# Altium PCB LogicsOnly.PcbDoc (part 3 of 3)
Units mm, origin at the board's own origin, x right, y up, seen from the top; angles counter-clockwise.
Board outline 98.85 x 158 mm, 2 copper layers (Top Layer, Bottom Layer); 236 components, 165 nets, 784 pads, 89 vias.
Unrouted connection lines stored in the file: 82.
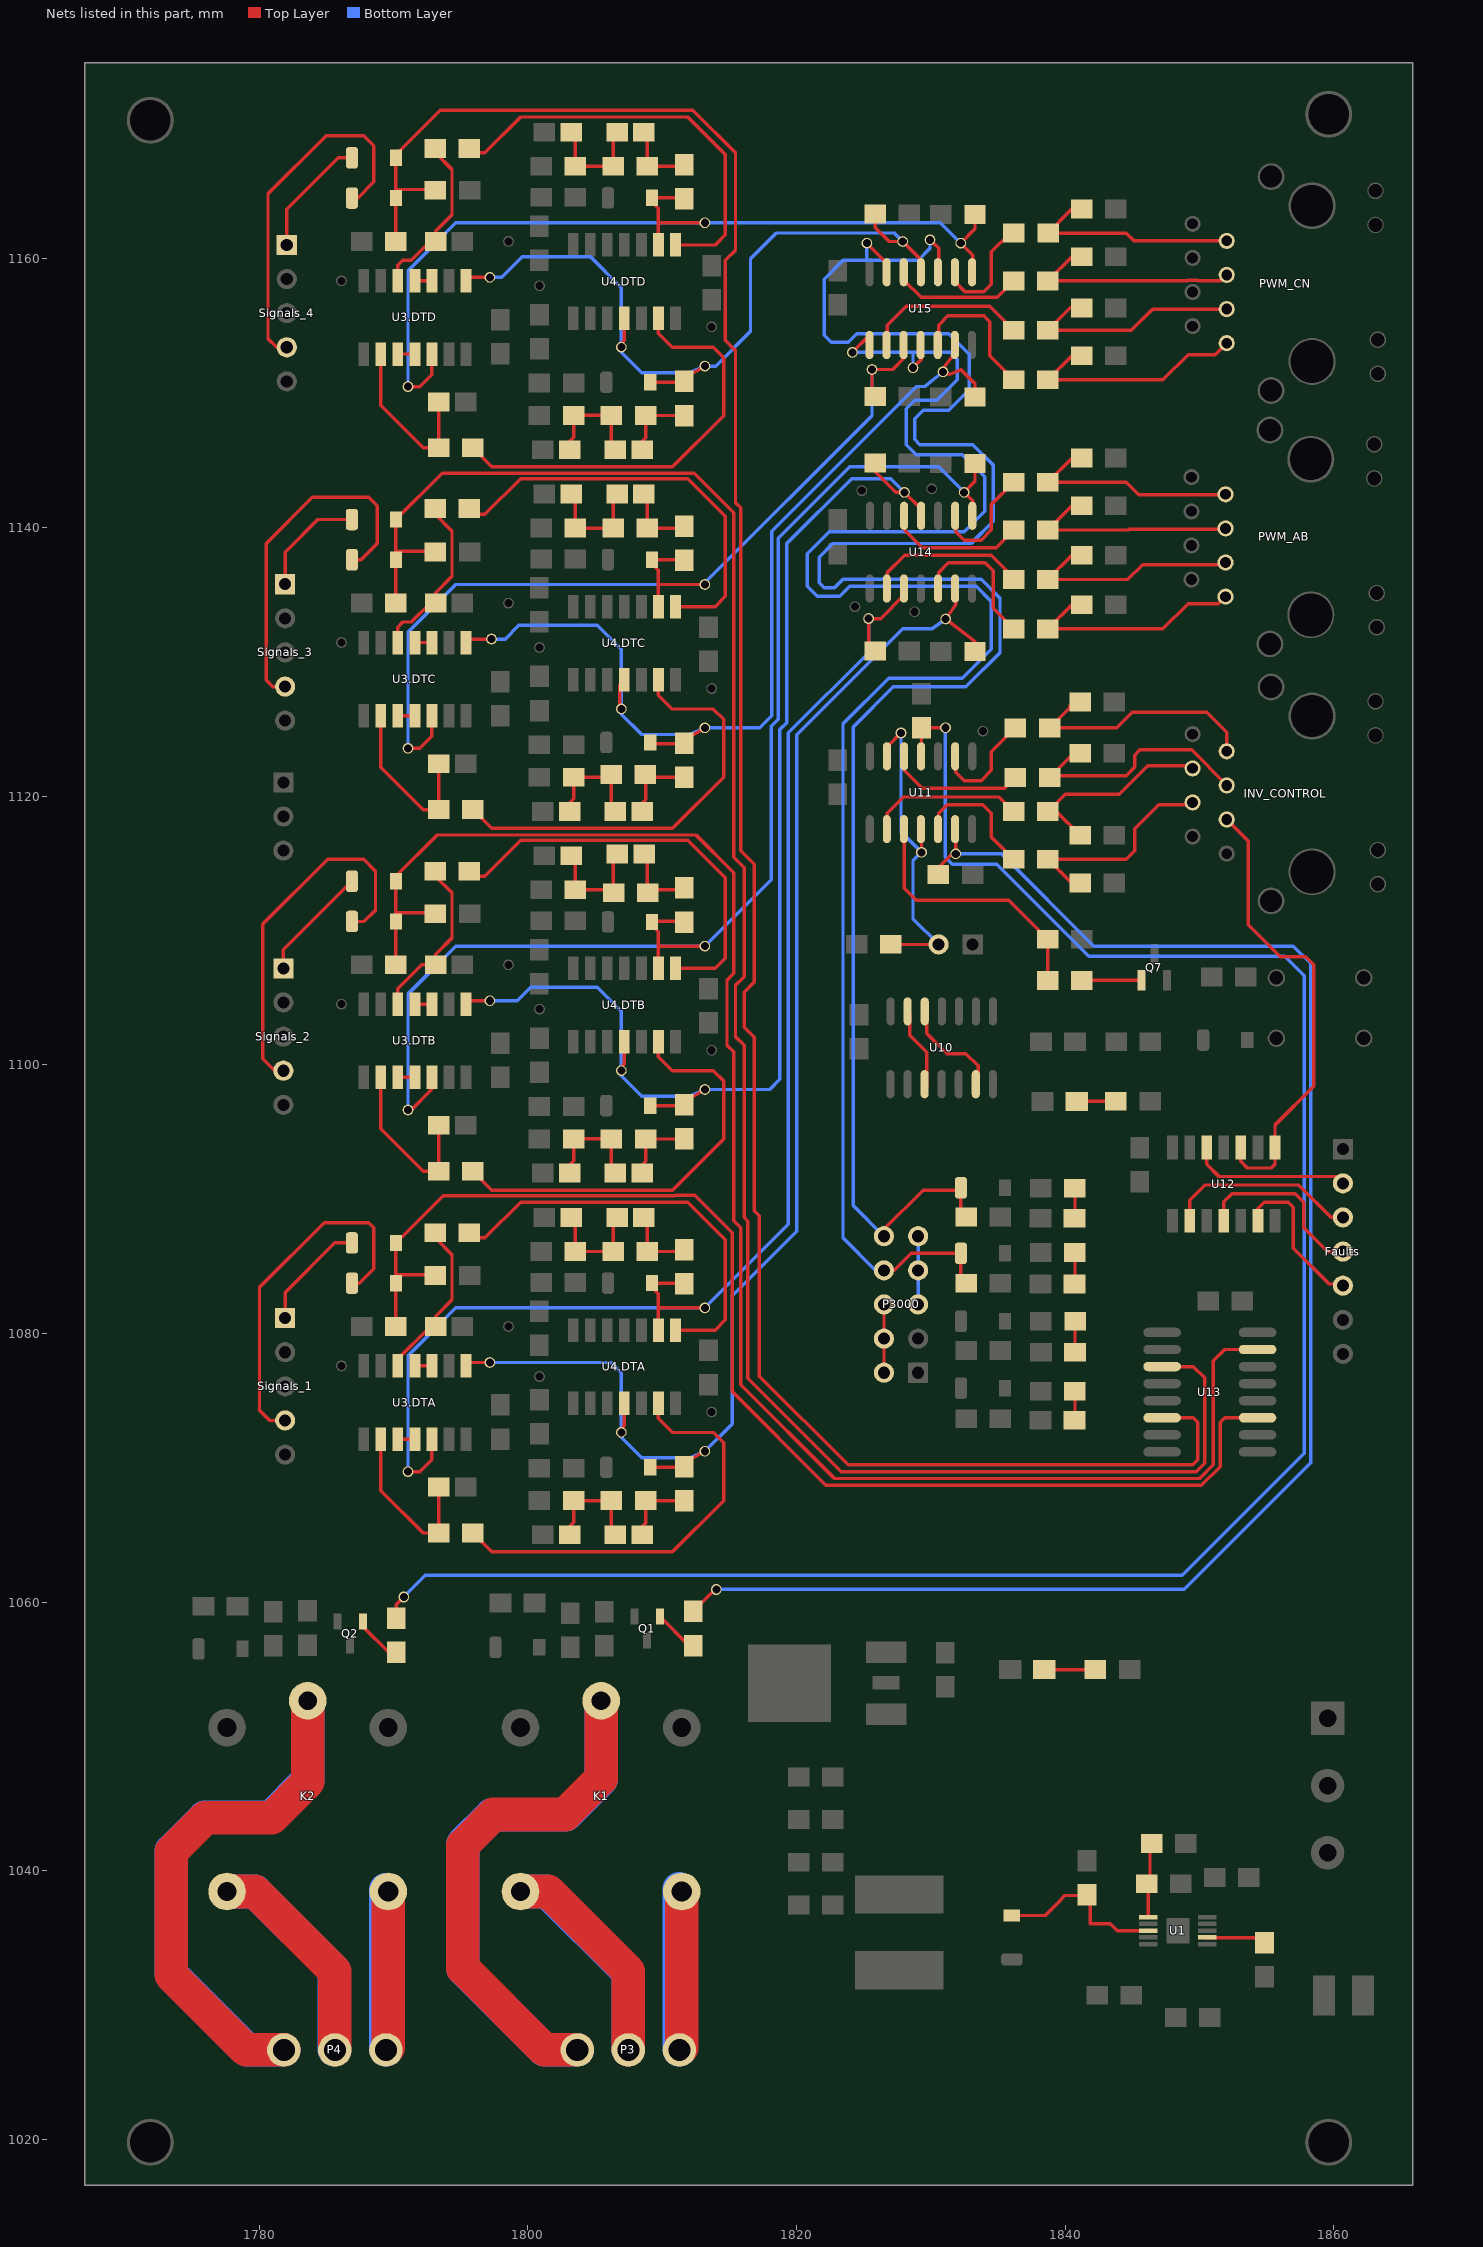
[diagram p3: the nets of this part, all layers, seen from the top]

## Via types
v1: diameter 0.8, hole 0.6, Top Layer to Bottom Layer, 59 vias
v2: diameter 0.914/0.914 (per signal layer), hole 0.6, Top Layer to Bottom Layer, 26 vias
v3: diameter 1.27, hole 0.711, Top Layer to Bottom Layer, 4 vias

## Nets (pads, with @x,y where several pads share a name; then routed paths per layer and width w, separated by ;. In a path a pad name is that pad's centre, name@x,y a point inside that pad or via, vN(x,y) a via of type N, cw(c..) or ccw(c..) an arc to the next point about the centre after c; other vN are vias at no path point) (continued)
NetD24_2: D24.2 P3000.8 pad.28 pad.29 R70.2 U15.1 U15.4 | length 131.2
  Top Layer w0.254: pad.28@1824.156,1153.033 U15.1@1825.489,1154.366 ; P3000.8@1826.505,1084.707 1827.267,1084.707 1828.537,1085.977 1831.728,1085.977 ; pad.29@1828.664,1151.89 1829.299,1152.525 U15.4@1829.299,1154.366 ; D24.2@1832.236,1085.977 1832.236,1084.137 R70.2@1832.621,1083.752
  Bottom Layer w0.254: pad.28@1824.156,1153.033 1828.664,1153.033 ; P3000.8@1826.505,1084.707 1825.87,1084.707 1823.457,1087.12 1823.457,1125.387 1826.846,1128.776 1832.347,1128.776 1834.506,1130.935 1834.506,1134.491 1833.363,1135.634 1823.965,1135.634 1823.203,1134.872 1821.552,1134.872 1820.79,1135.634 1820.79,1138.047 1822.441,1139.698 1832.474,1139.698 1833.998,1141.222 1833.998,1143.762 1832.347,1145.413 1828.918,1145.413 1828.156,1146.175 1828.156,1148.842 1828.791,1149.477 1830.442,1149.477 1831.966,1151.001 1831.966,1152.525 1831.458,1153.033 1828.664,1153.033 ; pad.29@1828.664,1151.89 1828.664,1153.033
NetD25_2: D25.2 P3000.10 pad.26 pad.27 R71.2 U15.10 U15.13 | length 148.3
  Top Layer w0.254: pad.27@1825.235,1161.161 1826.759,1159.637 U15.13@1826.759,1159.066 ; P3000.10@1826.505,1087.247 1826.505,1087.755 1829.426,1090.676 D25.2@1832.236,1090.676 ; pad.26@1830.061,1161.288 1830.569,1160.78 U15.10@1830.569,1159.066 ; D25.2@1832.236,1090.851 D25.2@1832.236,1090.676 ; R71.2@1832.621,1088.679 1832.236,1089.064 D25.2@1832.236,1090.676
  Bottom Layer w0.254: pad.27@1825.235,1161.161 1825.235,1159.891 ; P3000.10@1826.505,1087.247 1824.219,1089.533 1824.219,1125.149 1827.211,1128.141 1832.601,1128.141 1835.141,1130.681 1835.141,1134.745 1833.744,1136.142 1823.457,1136.142 1822.822,1135.507 1822.06,1135.507 1821.679,1135.888 1821.679,1137.793 1822.695,1138.809 1832.982,1138.809 1834.633,1140.46 1834.633,1144.651 1833.109,1146.175 1829.172,1146.175 1828.791,1146.556 1828.791,1148.08 1829.426,1148.715 1831.331,1148.715 1832.855,1150.239 1832.855,1152.906 1831.331,1154.43 1824.473,1154.43 1823.838,1153.795 1822.568,1153.795 1822.06,1154.303 1822.06,1158.494 1823.457,1159.891 1825.235,1159.891 ; pad.26@1829.934,1161.415 1829.934,1160.78 1829.045,1159.891 1825.235,1159.891
NetD26_1: D26.1 R64.1 | length 2.1
  Top Layer w0.254: D26.1@1840.697,1073.756 1840.722,1073.782 R64.1@1840.722,1075.703 R64.1@1840.722,1075.877
NetD27_1: D27.1 R65.1 | length 2.1
  Top Layer w0.254: D27.1@1840.722,1078.684 R65.1@1840.722,1080.792
NetD28_1: D28.1 R66.1 | length 2.4
  Top Layer w0.254: D28.1@1840.697,1083.688 1840.722,1083.713 R66.1@1840.722,1086.041
NetD29_1: D29.1 R67.1 | length 2.2
  Top Layer w0.254: D29.1@1840.697,1088.59 1840.722,1088.616 R67.1@1840.722,1090.812
NetD32_2: D32.2 R73.2 | length 3.8
  Top Layer w0.254: D32.2@1838.443,1054.989 1842.237,1054.989 R73.2@1842.246,1054.998
NetD33_1: D33.1 Rsns1.1 U1.8 | length 13.6
  Top Layer w0.254: D33.1@1836.03,1036.685 1838.503,1036.685 1839.357,1037.539 1839.967,1038.174 Rsns1.1@1841.631,1038.174 ; Rsns1.1@1841.631,1038.631 Rsns1.1@1841.631,1038.174 ; U1.8@1846.19,1035.558 1843.872,1035.558 1843.364,1036.066 1841.872,1036.066 1841.872,1038.174 Rsns1.1@1841.631,1038.174
NetD445_2: D445.2 R48.2 | length 2.9
  Top Layer w0.254: D445.2@1840.856,1097.28 1843.761,1097.28 R48.2@1843.77,1097.289
NetFaults_2: Faults.2 U12.12 | length 12
  Top Layer w0.254: U12.12@1850.53,1093.851 1850.53,1092.603 1851.442,1091.692 1860.16,1091.692 Faults.2@1860.668,1091.184
NetFaults_3: Faults.3 U12.2 | length 14.4
  Top Layer w0.254: U12.2@1849.26,1088.401 1849.26,1089.936 1850.381,1091.057 1857.366,1091.057 1859.779,1088.644 Faults.3@1860.668,1088.644
NetFaults_4: Faults.4 U12.4 | length 13.4
  Top Layer w0.254: U12.4@1851.8,1088.401 1851.8,1089.809 1852.413,1090.422 1857.112,1090.422 1857.747,1089.787 1857.747,1087.882 1859.525,1086.104 Faults.4@1860.668,1086.104
NetFaults_5: Faults.5 U12.6 | length 11.7
  Top Layer w0.254: U12.6@1854.34,1088.401 1854.34,1089.301 1854.826,1089.787 1856.604,1089.787 1856.985,1089.406 1856.985,1086.358 1859.652,1083.691 Faults.5@1860.668,1083.691
NetINV_CONTROL_3: INV_CONTROL.3 U12.8 U12.10 | length 33.7
  Top Layer w0.254: INV_CONTROL.3@1852.02,1118.265 1853.62,1116.665 1853.62,1110.43 1856,1108.05 1857.899,1108.05 1858.509,1107.44 1858.509,1098.423 1855.61,1095.524 1855.61,1094.762 1855.588,1094.74 ; U12.10@1853.07,1093.851 1853.07,1092.813 1853.556,1092.327 1855.334,1092.327 1855.61,1092.603 U12.8@1855.61,1093.851
NetINV_CONTROL_4: INV_CONTROL.4 R39.2 R54.2 | length 16.6
  Top Layer w0.254: R54.2@1841.103,1113.545 1840.463,1113.545 R39.2@1838.704,1115.305 1844.53,1115.305 1845.174,1115.949 1845.174,1117.564 1846.968,1119.358 1849.303,1119.358 INV_CONTROL.4@1849.48,1119.535
NetINV_CONTROL_5: INV_CONTROL.5 R55.2 R74.2 | length 18.6
  Top Layer w0.254: R74.2@1838.831,1121.401 R74.2@1838.967,1121.537 ; R74.2@1838.831,1121.537 R74.2@1838.967,1121.537 ; R55.2@1841.103,1123.197 1840.628,1123.197 R74.2@1838.967,1121.537 ; INV_CONTROL.5@1852.02,1120.805 1852.02,1120.83 1849.408,1123.442 1845.555,1123.442 1845.174,1123.061 1845.174,1122.172 1844.539,1121.537 R74.2@1838.967,1121.537
NetINV_CONTROL_6: INV_CONTROL.6 R38.2 R53.2 | length 15.4
  Top Layer w0.254: R53.2@1841.103,1117.101 1839.344,1118.861 R38.2@1838.704,1118.861 1839.983,1120.14 1844.031,1120.14 1846.153,1122.262 1849.293,1122.262 INV_CONTROL.6@1849.48,1122.075
NetINV_CONTROL_7: INV_CONTROL.7 R36.2 R52.2 | length 19.4
  Top Layer w0.254: R36.2@1838.831,1125.084 R36.2@1838.958,1125.211 ; R36.2@1838.958,1125.084 R36.2@1838.958,1125.211 ; R52.2@1841.23,1127.007 R52.2@1841.103,1127.007 1840.611,1127.007 1840.339,1126.735 1840.482,1126.735 R36.2@1839.029,1125.282 ; INV_CONTROL.7@1852.02,1123.345 1852.02,1124.75 1850.534,1126.236 1844.981,1126.236 1843.838,1125.093 1839.219,1125.093 R36.2@1839.029,1125.282 ; R36.2@1838.958,1125.211 1838.958,1125.354 R36.2@1839.029,1125.282 ; R36.2@1838.958,1125.211 R36.2@1839.029,1125.282
NetJP1.DTA_2: JP1.DTA.2 R6.DTA.2 U3.DTA.5 | length 12
  Top Layer w0.254: U3.DTA.5@1790.319,1077.591 1790.319,1078.106 1792.736,1080.523 JP1.DTA.2@1793.129,1080.523 1793.129,1081.297 1794.352,1082.52 1794.352,1085.876 R6.DTA.2@1793.101,1087.127
NetJP1.DTB_2: JP1.DTB.2 R6.DTB.2 U3.DTB.5 | length 12.3
  Top Layer w0.254: U3.DTB.5@1790.319,1104.515 1790.319,1105.665 1792.101,1107.447 JP1.DTB.2@1793.129,1107.447 1793.129,1108.221 1794.352,1109.444 1794.352,1112.8 R6.DTB.2@1793.101,1114.051
NetJP1.DTC_2: JP1.DTC.2 R6.DTC.2 U3.DTC.5 | length 12.3
  Top Layer w0.254: U3.DTC.5@1790.319,1131.439 1790.319,1132.589 1790.695,1132.964 1791.33,1132.964 1792.736,1134.371 JP1.DTC.2@1793.129,1134.371 1793.129,1135.145 1794.352,1136.368 1794.352,1139.724 R6.DTC.2@1793.101,1140.975
NetJP1.DTD_2: JP1.DTD.2 R6.DTD.2 U3.DTD.5 | length 12.3
  Top Layer w0.254: U3.DTD.5@1790.319,1158.363 1790.319,1159.513 1790.695,1159.888 1791.33,1159.888 1792.736,1161.295 JP1.DTD.2@1793.129,1161.295 1793.129,1162.069 1794.352,1163.292 1794.352,1166.648 R6.DTD.2@1793.101,1167.899
NetJP2.DTA_1: JP2.DTA.1 JP3.DTA.2 R9.DTA.2 R10.DTA.1 | length 8.1
  Top Layer w0.254: JP3.DTA.2@1803.236,1088.641 1803.527,1088.35 R10.DTA.1@1803.527,1086.111 R9.DTA.2@1806.348,1086.111 1806.348,1088.35 JP2.DTA.1@1806.64,1088.641
NetJP2.DTA_2: JP2.DTA.2 R8.DTA.2 R9.DTA.1 | length 5.4
  Top Layer w0.254: JP2.DTA.2@1808.64,1088.641 1808.888,1088.393 R9.DTA.1@1808.888,1086.111 1811.512,1086.111 R8.DTA.2@1811.646,1086.245
NetJP2.DTB_1: JP2.DTB.1 JP3.DTB.2 R9.DTB.2 R10.DTB.1 | length 8.1
  Top Layer w0.254: JP3.DTB.2@1803.236,1115.565 1803.527,1115.274 R10.DTB.1@1803.527,1113.035 1806.348,1113.035 1806.348,1115.274 JP2.DTB.1@1806.64,1115.565
NetJP2.DTB_2: JP2.DTB.2 R8.DTB.2 R9.DTB.1 | length 5.4
  Top Layer w0.254: JP2.DTB.2@1808.64,1115.565 1808.888,1115.317 1808.888,1113.035 1811.512,1113.035 R8.DTB.2@1811.646,1113.169
NetJP2.DTC_1: JP2.DTC.1 JP3.DTC.2 R9.DTC.2 R10.DTC.1 | length 8.1
  Top Layer w0.254: JP3.DTC.2@1803.236,1142.489 1803.527,1142.198 R10.DTC.1@1803.527,1139.959 R9.DTC.2@1806.348,1139.959 1806.348,1142.198 JP2.DTC.1@1806.64,1142.489
NetJP2.DTC_2: JP2.DTC.2 R8.DTC.2 R9.DTC.1 | length 5.4
  Top Layer w0.254: JP2.DTC.2@1808.64,1142.489 1808.888,1142.241 R9.DTC.1@1808.888,1139.959 1811.512,1139.959 R8.DTC.2@1811.646,1140.093
NetJP2.DTD_1: JP2.DTD.1 JP3.DTD.2 R9.DTD.2 R10.DTD.1 | length 8.1
  Top Layer w0.254: JP3.DTD.2@1803.236,1169.413 1803.527,1169.122 R10.DTD.1@1803.527,1166.883 R9.DTD.2@1806.348,1166.883 1806.348,1169.122 JP2.DTD.1@1806.64,1169.413
NetJP2.DTD_2: JP2.DTD.2 R8.DTD.2 R9.DTD.1 | length 5.4
  Top Layer w0.254: JP2.DTD.2@1808.64,1169.413 1808.888,1169.165 R9.DTD.1@1808.888,1166.883 1811.512,1166.883 R8.DTD.2@1811.646,1167.017
NetJP4.DTA_2: JP4.DTA.2 R13.DTA.2 U3.DTA.9 | length 12.9
  Top Layer w0.254: U3.DTA.9@1789.049,1072.141 1789.049,1068.316 1792.209,1065.156 R13.DTA.2@1793.355,1065.156 1793.378,1065.179 JP4.DTA.2@1793.378,1068.575
NetJP4.DTB_2: JP4.DTB.2 R13.DTB.2 U3.DTB.9 | length 12.9
  Top Layer w0.254: U3.DTB.9@1789.049,1099.065 1789.049,1095.24 1792.209,1092.08 R13.DTB.2@1793.355,1092.08 1793.378,1092.103 JP4.DTB.2@1793.378,1095.499
NetJP4.DTC_2: JP4.DTC.2 R13.DTC.2 U3.DTC.9 | length 12.9
  Top Layer w0.254: U3.DTC.9@1789.049,1125.989 1789.049,1122.164 1792.209,1119.004 R13.DTC.2@1793.355,1119.004 1793.378,1119.027 JP4.DTC.2@1793.378,1122.423
NetJP4.DTD_2: JP4.DTD.2 R13.DTD.2 U3.DTD.9 | length 12.9
  Top Layer w0.254: U3.DTD.9@1789.049,1152.913 1789.049,1149.088 1792.209,1145.928 R13.DTD.2@1793.355,1145.928 1793.378,1145.951 JP4.DTD.2@1793.378,1149.347
NetJP5_2: JP5.2 R49.1 U11.4 U11.13 | length 25.6
  Top Layer w0.254: U11.13@1826.759,1122.617 1826.759,1123.696 v1(1827.775,1124.712) ; R49.1@1827.006,1108.973 1827.016,1108.964 JP5.2@1830.569,1108.964 ; v1(1829.299,1115.822) U11.4@1829.299,1117.917
  Bottom Layer w0.254: v1(1827.775,1124.712) 1827.775,1117.346 v1(1829.299,1115.822) 1828.664,1115.187 1828.664,1110.869 JP5.2@1830.569,1108.964
NetJP6.DTA_1: JP6.DTA.1 JP7.DTA.2 R16.DTA.2 R17.DTA.1 | length 8.2
  Top Layer w0.254: JP7.DTA.2@1803.109,1065.019 1803.109,1065.654 1803.4,1065.946 R17.DTA.1@1803.4,1067.569 R16.DTA.2@1806.221,1067.569 1806.221,1065.311 JP6.DTA.1@1806.513,1065.019
NetJP6.DTA_2: JP6.DTA.2 R15.DTA.2 R16.DTA.1 | length 5.5
  Top Layer w0.254: JP6.DTA.2@1808.513,1065.019 1808.513,1065.654 1808.761,1065.903 R16.DTA.1@1808.761,1067.569 1808.768,1067.562 R15.DTA.2@1811.646,1067.562
NetJP6.DTB_1: JP6.DTB.1 JP7.DTB.2 R16.DTB.2 R17.DTB.1 | length 8.2
  Top Layer w0.254: JP7.DTB.2@1803.109,1091.943 1803.109,1092.578 1803.4,1092.87 R17.DTB.1@1803.4,1094.493 R16.DTB.2@1806.221,1094.493 1806.221,1092.235 JP6.DTB.1@1806.513,1091.943
NetJP6.DTB_2: JP6.DTB.2 R15.DTB.2 R16.DTB.1 | length 5.5
  Top Layer w0.254: JP6.DTB.2@1808.513,1091.943 1808.513,1092.578 1808.761,1092.827 R16.DTB.1@1808.761,1094.493 1808.768,1094.486 R15.DTB.2@1811.646,1094.486
NetJP6.DTC_1: JP6.DTC.1 JP7.DTC.2 R16.DTC.2 R17.DTC.1 | length 8.2
  Top Layer w0.254: JP7.DTC.2@1803.109,1118.867 1803.109,1119.502 1803.4,1119.794 R17.DTC.1@1803.4,1121.417 1806.221,1121.417 1806.221,1119.159 JP6.DTC.1@1806.513,1118.867
NetJP6.DTC_2: JP6.DTC.2 R15.DTC.2 R16.DTC.1 | length 5.5
  Top Layer w0.254: JP6.DTC.2@1808.513,1118.867 1808.513,1119.502 1808.761,1119.751 1808.761,1121.417 1808.768,1121.41 R15.DTC.2@1811.646,1121.41
NetJP6.DTD_1: JP6.DTD.1 JP7.DTD.2 R16.DTD.2 R17.DTD.1 | length 8.2
  Top Layer w0.254: JP7.DTD.2@1803.109,1145.791 1803.109,1146.426 1803.4,1146.718 R17.DTD.1@1803.4,1148.341 R16.DTD.2@1806.221,1148.341 1806.221,1146.083 JP6.DTD.1@1806.513,1145.791
NetJP6.DTD_2: JP6.DTD.2 R15.DTD.2 R16.DTD.1 | length 5.5
  Top Layer w0.254: JP6.DTD.2@1808.513,1145.791 1808.513,1146.426 1808.761,1146.675 R16.DTD.1@1808.761,1148.341 1808.768,1148.334 R15.DTD.2@1811.646,1148.334
NetK1_1: K1.1 P3.1 | length 76.8
  Top Layer w2.5: P3.1@1803.679,1026.677 1801.246,1026.677 1795.158,1032.766 1795.158,1041.917 1797.444,1044.203 1802.778,1044.203 1805.454,1046.88 K1.1@1805.454,1052.671
  Bottom Layer w2.5: P3.1@1803.679,1026.677 1801.233,1026.677 1795.14,1032.77 1795.14,1042 1797.32,1044.18 1802.82,1044.18 1805.454,1046.814 K1.1@1805.454,1052.671
NetK1_2: K1.2 P3.2 | length 32.6
  Top Layer w2.5: K1.2@1799.454,1038.471 1801.525,1038.471 1807.479,1032.516 P3.2@1807.479,1026.677
  Bottom Layer w2.5: K1.2@1799.454,1038.471 1801.429,1038.471 1807.479,1032.421 P3.2@1807.479,1026.677
NetK1_3: K1.3 P3.3 | length 23.9
  Top Layer w0.254: P3.3@1811.279,1026.677 P3.3@1811.454,1026.852
  Top Layer w2.5: P3.3@1811.454,1026.852 K1.3@1811.454,1038.471
  Bottom Layer w2.5: P3.3@1811.279,1026.677 K1.3@1811.279,1038.67
NetK2_1: K2.1 P4.1 | length 76.4
  Top Layer w2.5: P4.1@1781.835,1026.677 1779.029,1026.677 1773.441,1032.265 1773.441,1041.409 1775.981,1043.949 1780.934,1043.949 1783.61,1046.626 K2.1@1783.61,1052.671
  Bottom Layer w2.5: P4.1@1781.835,1026.677 1779.093,1026.677 1773.46,1032.31 1773.46,1041.5 1775.95,1043.99 1780.87,1043.99 1783.61,1046.73 K2.1@1783.61,1052.671
NetK2_2: K2.2 P4.2 | length 32.7
  Top Layer w2.5: K2.2@1777.61,1038.471 1779.681,1038.471 1785.635,1032.516 P4.2@1785.635,1026.677
  Bottom Layer w2.5: K2.2@1777.61,1038.471 1779.699,1038.471 1785.59,1032.58 P4.2@1785.59,1026.677
NetK2_3: K2.3 P4.3 | length 23.8
  Top Layer w0.254: P4.3@1789.435,1026.677 P4.3@1789.61,1026.852
  Top Layer w2.5: P4.3@1789.61,1026.852 K2.3@1789.61,1038.471
  Bottom Layer w2.5: P4.3@1789.435,1026.677 K2.3@1789.435,1038.6
NetP3000_2: P3000.2 P3000.4 P3000.6 | length 5.1
  Top Layer w0.254: P3000.2@1826.505,1077.087 P3000.4@1826.505,1079.627 P3000.6@1826.505,1082.167
NetP3000_5: P3000.5 P3000.7 P3000.9 | length 5.1
  Bottom Layer w0.254: P3000.5@1829.045,1082.167 P3000.7@1829.045,1084.707 P3000.9@1829.045,1087.247
NetPWM_AB_1: PWM_AB.1 R56.2 R75.2 | length 17.5
  Top Layer w0.254: R56.2@1841.23,1134.246 1840.501,1134.246 R75.2@1838.704,1132.45 1847.267,1132.45 1849.144,1134.327 1851.403,1134.327 PWM_AB.1@1851.93,1134.854
NetPWM_AB_3: PWM_AB.3 R57.2 R76.2 | length 17
  Top Layer w0.254: R57.2@1841.23,1137.929 1840.501,1137.929 R76.2@1838.704,1136.133 1844.657,1136.133 1845.754,1137.23 1851.766,1137.23 PWM_AB.3@1851.93,1137.394
NetPWM_AB_5: PWM_AB.5 R59.2 R78.2 | length 16.5
  Top Layer w0.254: R59.2@1841.23,1141.612 1840.501,1141.612 R78.2@1838.704,1139.816 1844.675,1139.816 1844.74,1139.88 1851.876,1139.88 PWM_AB.5@1851.93,1139.934
NetPWM_AB_7: PWM_AB.7 R58.2 R77.2 | length 16.9
  Top Layer w0.254: R58.2@1841.23,1145.168 1840.501,1145.168 R77.2@1838.704,1143.372 1844.548,1143.372 1845.48,1142.44 1851.896,1142.44 PWM_AB.7@1851.93,1142.474
NetPWM_CN_1: PWM_CN.1 R60.2 R79.2 | length 17.7
  Top Layer w0.254: R60.2@1841.23,1152.788 1840.501,1152.788 R79.2@1838.704,1150.992 1847.267,1150.992 1849.144,1152.869 1851.17,1152.869 PWM_CN.1@1852.02,1153.719
NetPWM_CN_3: PWM_CN.3 R61.2 R80.2 | length 17.2
  Top Layer w0.254: R61.2@1841.23,1156.344 1840.374,1156.344 R80.2@1838.704,1154.675 1844.911,1154.675 1846.495,1156.259 PWM_CN.3@1852.02,1156.259
NetPWM_CN_5: PWM_CN.5 R63.2 R82.2 | length 16.8
  Top Layer w0.254: R63.2@1841.23,1160.154 1840.501,1160.154 R82.2@1838.704,1158.358 1849.069,1158.358 1849.117,1158.406 1849.843,1158.406 1849.891,1158.358 1851.579,1158.358 PWM_CN.5@1852.02,1158.799
NetPWM_CN_7: PWM_CN.7 R62.2 R81.2 | length 16.8
  Top Layer w0.254: R62.2@1841.23,1163.71 1840.501,1163.71 1838.704,1161.914 R81.2@1838.716,1161.914 1844.548,1161.914 1845.136,1161.326 1845.149,1161.339 PWM_CN.7@1852.02,1161.339
NetQ1_1: Q1.1 R2.2 | length 3.4
  Top Layer w0.254: Q1.1@1809.824,1058.946 1811.994,1056.776 R2.2@1812.303,1056.776
NetQ2_1: Q2.1 R4.2 | length 3.3
  Top Layer w0.254: Q2.1@1787.726,1058.191 1789.648,1056.268 R4.2@1790.205,1056.268
NetQ7_1: Q7.1 R51.2 | length 4.4
  Top Layer w0.254: R51.2@1841.244,1106.288 1841.253,1106.297 Q7.1@1845.687,1106.297
NetR2_1: R2.1 R12.2 U11.6 | length 121.9
  Top Layer w0.254: R2.1@1812.303,1059.316 1813.944,1060.958 v1(1814.028,1060.958) ; R12.2@1830.562,1114.18 1830.562,1114.672 1831.6,1115.71 v1(1831.85,1115.71) 1831.85,1117.906 U11.6@1831.839,1117.917
  Bottom Layer w0.254: v1(1814.028,1060.958) 1848.857,1060.958 1858.27,1070.371 1858.27,1107.552 1856.985,1108.837 1842.126,1108.837 1835.253,1115.71 v1(1831.85,1115.71)
NetR4_1: R4.1 R18.2 U11.11 | length 153.1
  Top Layer w0.254: R4.1@1790.205,1058.808 1790.205,1059.835 v1(1790.77,1060.4) ; U11.11@1829.299,1122.617 1829.299,1125.077 R18.2@1829.29,1125.086 1831.07,1125.086 v1(1831.077,1125.093)
  Bottom Layer w0.254: v1(1790.77,1060.4) 1792.37,1062 1848.693,1062 1857.78,1071.087 1857.78,1106.645 1856.35,1108.075 1841.745,1108.075 1834.887,1114.933 1831.585,1114.933 1831.077,1115.441 v1(1831.077,1125.093)
NetR5_2: R5.2 R51.1 U11.3 | length 20.1
  Top Layer w0.254: U11.3@1828.029,1117.917 1828.029,1113.155 1828.918,1112.266 1835.779,1112.266 R5.2@1838.69,1109.354 1838.704,1109.341 R51.1@1838.704,1106.288
NetR6.DTA_1: R6.DTA.1 U4.DTA.1 | length 31.3
  Top Layer w0.254: R6.DTA.1@1795.641,1087.127 1796.8,1087.127 1799.458,1089.784 1811.904,1089.784 1814.698,1086.99 1814.698,1081.021 1813.934,1080.258 U4.DTA.1@1810.989,1080.258
NetR6.DTB_1: R6.DTB.1 U4.DTB.1 | length 31.3
  Top Layer w0.254: R6.DTB.1@1795.641,1114.051 1796.8,1114.051 1799.458,1116.708 1811.904,1116.708 1814.698,1113.914 1814.698,1107.945 1813.934,1107.182 U4.DTB.1@1810.989,1107.182
NetR6.DTC_1: R6.DTC.1 U4.DTC.1 | length 31.3
  Top Layer w0.254: R6.DTC.1@1795.641,1140.975 1796.8,1140.975 1799.458,1143.632 1811.904,1143.632 1814.698,1140.838 1814.698,1134.869 1813.934,1134.106 U4.DTC.1@1810.989,1134.106
NetR6.DTD_1: R6.DTD.1 U4.DTD.1 | length 31.3
  Top Layer w0.254: R6.DTD.1@1795.641,1167.899 1796.8,1167.899 1799.458,1170.556 1811.904,1170.556 1814.698,1167.762 1814.698,1161.793 1813.934,1161.03 U4.DTD.1@1810.989,1161.03
NetR13.DTA_1: R13.DTA.1 U4.DTA.13 | length 31.9
  Top Layer w0.254: R13.DTA.1@1795.895,1065.156 1797.299,1063.752 1810.763,1063.752 1814.571,1067.559 1814.571,1071.877 1813.809,1072.639 1810.761,1072.639 1809.719,1073.681 U4.DTA.13@1809.719,1074.808
NetR13.DTB_1: R13.DTB.1 U4.DTB.13 | length 31.9
  Top Layer w0.254: R13.DTB.1@1795.895,1092.08 1797.299,1090.676 1810.763,1090.676 1814.571,1094.483 1814.571,1098.801 1813.809,1099.563 1810.761,1099.563 1809.719,1100.605 U4.DTB.13@1809.719,1101.732
NetR13.DTC_1: R13.DTC.1 U4.DTC.13 | length 31.9
  Top Layer w0.254: R13.DTC.1@1795.895,1119.004 1797.299,1117.6 1810.763,1117.6 1814.571,1121.407 1814.571,1125.725 1813.809,1126.487 1810.761,1126.487 1809.719,1127.529 U4.DTC.13@1809.719,1128.656
NetR13.DTD_1: R13.DTD.1 U4.DTD.13 | length 31.9
  Top Layer w0.254: R13.DTD.1@1795.895,1145.928 1797.299,1144.524 1810.763,1144.524 1814.571,1148.331 1814.571,1152.649 1813.809,1153.411 1810.761,1153.411 1809.719,1154.453 U4.DTD.13@1809.719,1155.58
NetR36_1: R36.1 U11.9 | length 8
  Top Layer w0.254: U11.9@1831.839,1122.617 1831.839,1121.791 1832.474,1121.156 1833.744,1121.156 1834.506,1121.918 1834.506,1123.299 R36.1@1836.291,1125.084
NetR38_1: R38.1 U11.2 | length 11.2
  Top Layer w0.254: U11.2@1826.759,1117.917 1826.759,1118.743 1827.953,1119.937 1835.087,1119.937 R38.1@1836.164,1118.861
NetR39_1: R39.1 U11.5 | length 9.4
  Top Layer w0.254: U11.5@1830.569,1117.917 1830.569,1118.743 1831.204,1119.378 1833.871,1119.378 1834.506,1118.743 1834.506,1116.962 R39.1@1836.164,1115.305
NetR74_1: R74.1 U11.12 | length 9.8
  Top Layer w0.254: U11.12@1828.029,1122.617 1828.029,1121.918 1829.35,1120.597 1835.487,1120.597 R74.1@1836.291,1121.401
NetR75_1: R75.1 U14.5 | length 10.4
  Top Layer w0.254: U14.5@1830.569,1135.824 1830.569,1136.65 1831.305,1137.386 1834.024,1137.386 1834.633,1136.777 1834.633,1133.98 R75.1@1836.164,1132.45
NetR76_1: R76.1 U14.2 | length 11.6
  Top Layer w0.254: U14.2@1826.759,1135.824 1826.759,1136.65 1828.054,1137.945 1834.481,1137.945 1836.164,1136.262 R76.1@1836.164,1136.133
NetR77_1: R77.1 U14.9 | length 8.3
  Top Layer w0.254: U14.9@1831.839,1140.524 1831.839,1139.698 1832.474,1139.063 1833.744,1139.063 1834.506,1139.825 1834.506,1141.714 R77.1@1836.164,1143.372
NetR78_1: R78.1 U14.12 | length 9.9
  Top Layer w0.254: U14.12@1828.029,1140.524 1828.029,1139.825 1829.35,1138.504 1834.852,1138.504 R78.1@1836.164,1139.816
NetR79_1: R79.1 U15.5 | length 10
  Top Layer w0.254: U15.5@1830.569,1154.366 1830.569,1155.065 1831.252,1155.748 1833.958,1155.748 ; 1833.958,1155.74 1834.379,1155.319 1834.379,1152.776 R79.1@1836.164,1150.992
NetR80_1: R80.1 U15.2 | length 11.7
  Top Layer w0.254: U15.2@1826.759,1154.08 1826.759,1155.065 1828.156,1156.462 1834.376,1156.462 R80.1@1836.164,1154.675
NetR81_1: R81.1 U15.9 | length 8.7
  Top Layer w0.254: U15.9@1831.839,1159.066 1831.839,1158.24 1832.539,1157.54 1833.933,1157.54 1834.506,1158.113 1834.506,1160.526 1835.894,1161.914 R81.1@1836.164,1161.914
NetR82_1: R82.1 U15.12 | length 9.9
  Top Layer w0.254: U15.12@1828.029,1159.066 1828.029,1158.367 1829.271,1157.125 1834.931,1157.125 R82.1@1836.164,1158.358
NetRfb1_2: Rfb1.2 Rfb2.1 U1.6 | length 5.4
  Top Layer w0.254: U1.6@1846.19,1036.559 1846.19,1038.927 Rfb2.1@1846.07,1039.047 1846.31,1039.287 Rfb1.2@1846.31,1041.781 ; U1.6@1846.342,1036.574 U1.6@1846.368,1036.549
NetRt1_2: Rt1.2 U1.2 | length 5.1
  Top Layer w0.254: U1.2@1850.457,1035.025 1854.089,1035.025 1854.826,1034.288 Rt1.2@1855.207,1034.288
NetU3.DTA_3: U3.DTA.3 U3.DTA.4 | length 1.3
  Top Layer w0.254: U3.DTA.4@1791.589,1077.591 U3.DTA.3@1792.859,1077.591
NetU3.DTA_10: U3.DTA.10 U3.DTA.11 | length 1.3
  Top Layer w0.254: U3.DTA.10@1790.319,1072.141 U3.DTA.11@1791.589,1072.141
NetU3.DTB_3: U3.DTB.3 U3.DTB.4 | length 1.3
  Top Layer w0.254: U3.DTB.4@1791.589,1104.515 U3.DTB.3@1792.859,1104.515
NetU3.DTB_10: U3.DTB.10 U3.DTB.11 | length 1.3
  Top Layer w0.254: U3.DTB.10@1790.319,1099.065 U3.DTB.11@1791.589,1099.065
NetU3.DTC_3: U3.DTC.3 U3.DTC.4 | length 1.3
  Top Layer w0.254: U3.DTC.4@1791.589,1131.439 U3.DTC.3@1792.859,1131.439
NetU3.DTC_10: U3.DTC.10 U3.DTC.11 | length 1.3
  Top Layer w0.254: U3.DTC.10@1790.319,1125.989 U3.DTC.11@1791.589,1125.989
NetU3.DTD_3: U3.DTD.3 U3.DTD.4 | length 1.3
  Top Layer w0.254: U3.DTD.4@1791.589,1158.363 U3.DTD.3@1792.859,1158.363
NetU3.DTD_10: U3.DTD.10 U3.DTD.11 | length 1.3
  Top Layer w0.254: U3.DTD.10@1790.319,1152.913 U3.DTD.11@1791.589,1152.913
NetU10_3: U10.3 U10.13 | length 6
  Top Layer w0.254: U10.13@1828.432,1103.757 1828.432,1102.211 1829.702,1100.941 U10.3@1829.702,1098.307
NetU10_6: U10.6 U10.12 | length 7.8
  Top Layer w0.254: U10.12@1829.702,1103.757 1829.702,1102.338 1831.204,1100.836 1832.601,1100.836 1833.512,1099.925 U10.6@1833.512,1098.307
OK-PH1: C6.DTA.1 D6.DTA.1 D7.DTA.1 R11.DTA.1 U13.11 | length 93.5
  Top Layer w0.254: C6.DTA.1@1790.18,1080.523 1790.176,1080.526 D6.DTA.1@1790.176,1083.752 1790.176,1084.387 ; R11.DTA.1@1793.12,1084.323 1793.057,1084.387 1790.176,1084.387 ; U13.11@1853.162,1073.736 1851.856,1073.736 1851.524,1073.404 1851.524,1070.102 1850.127,1068.705 1822.187,1068.705 1815.202,1075.69 1815.202,1087.501 1812.408,1090.295 1810.954,1090.295 1810.931,1090.272 1793.716,1090.272 1790.19,1086.746 D7.DTA.1@1790.176,1086.746 1790.176,1084.387
OK-PH2: C6.DTB.1 D6.DTB.1 D7.DTB.1 R11.DTB.1 U13.15 | length 124.6
  Top Layer w0.254: C6.DTB.1@1790.18,1107.447 1790.176,1107.45 D6.DTB.1@1790.176,1110.676 1790.176,1111.311 ; R11.DTB.1@1793.12,1111.247 1793.057,1111.311 1790.176,1111.311 ; U13.15@1853.162,1078.816 1851.856,1078.816 1851.016,1077.976 1851.016,1070.229 1850,1069.213 1822.822,1069.213 1815.837,1076.198 1815.837,1087.882 1815.329,1088.39 1815.329,1100.963 1814.821,1101.471 1814.821,1106.297 1815.329,1106.805 1815.329,1114.298 1812.515,1117.112 1793.251,1117.112 1790.176,1114.037 D7.DTB.1@1790.176,1113.67 1790.176,1111.311
OK-PH3: C6.DTC.1 D6.DTC.1 D7.DTC.1 R11.DTC.1 U13.3 | length 148.2
  Top Layer w0.254: C6.DTC.1@1790.18,1134.371 1790.176,1134.374 D6.DTC.1@1790.176,1137.6 1790.176,1138.235 ; R11.DTC.1@1793.12,1138.171 1793.057,1138.235 1790.176,1138.235 ; U13.3@1848.362,1077.546 1849.541,1077.546 1850.381,1076.706 1850.381,1070.356 1849.746,1069.721 1823.33,1069.721 1816.368,1076.683 1816.368,1088.367 1816.091,1088.644 1816.091,1101.471 1815.456,1102.106 1815.456,1105.916 1816.091,1106.551 1816.091,1114.679 1815.329,1115.441 1815.329,1141.095 1812.388,1144.036 1793.619,1144.036 D7.DTC.1@1790.176,1140.594 1790.176,1138.235
OK-PH4: C6.DTD.1 D6.DTD.1 D7.DTD.1 R11.DTD.1 U13.6 | length 170.4
  Top Layer w0.254: C6.DTD.1@1790.18,1161.295 1790.176,1161.298 D6.DTD.1@1790.176,1164.524 1790.176,1165.159 ; R11.DTD.1@1793.12,1165.095 1793.057,1165.159 1790.176,1165.159 ; U13.6@1848.362,1073.736 1849.541,1073.736 1849.873,1073.404 1849.873,1070.61 1849.492,1070.229 1823.838,1070.229 1817.234,1076.833 1817.234,1088.771 1816.853,1089.152 1816.853,1102.043 1816.091,1102.805 1816.091,1105.408 1816.853,1106.17 1816.853,1114.933 1815.837,1115.949 1815.837,1141.476 1815.456,1141.857 1815.456,1153.16 1814.694,1153.922 1814.694,1159.891 1815.456,1160.653 1815.456,1167.892 1812.281,1171.067 1793.485,1171.067 1790.176,1167.758 D7.DTD.1@1790.176,1167.518 1790.176,1165.159
OK-PHB1: D6.DTA.2 Signals_1.4 | length 27.2
  Top Layer w0.254: Signals_1.4@1781.928,1073.531 1780.785,1073.531 1780.023,1074.293 1780.023,1083.437 1784.849,1088.263 1788.151,1088.263 1788.532,1087.882 1788.532,1084.834 1787.45,1083.752 D6.DTA.2@1786.906,1083.752
OK-PHB2: D6.DTB.2 Signals_2.4 | length 27.7
  Top Layer w0.254: Signals_2.4@1781.801,1099.566 1781.166,1099.566 1780.277,1100.455 1780.277,1110.488 1785.103,1115.314 1787.77,1115.314 1788.659,1114.425 1788.659,1111.504 1787.831,1110.676 D6.DTB.2@1786.906,1110.676
OK-PHB3: D6.DTC.2 Signals_3.4 | length 26.9
  Top Layer w0.254: Signals_3.4@1781.928,1128.16 1781.02,1128.16 1780.531,1128.649 1780.531,1138.809 1783.96,1142.238 1788.151,1142.238 1788.786,1141.603 1788.786,1138.809 1787.577,1137.6 D6.DTC.2@1786.906,1137.6
OK-PHB4: D6.DTD.2 Signals_4.4 | length 27.2
  Top Layer w0.254: Signals_4.4@1782.055,1153.414 1781.293,1153.414 1780.658,1154.049 1780.658,1164.844 1784.976,1169.162 1787.77,1169.162 1788.532,1168.4 1788.532,1165.733 1787.323,1164.524 D6.DTD.2@1786.906,1164.524
OK-PHT1: D7.DTA.2 Signals_1.1 | length 8.4
  Top Layer w0.254: Signals_1.1@1781.928,1081.151 1781.928,1083.056 1785.618,1086.746 D7.DTA.2@1786.906,1086.746
OK-PHT2: D7.DTB.2 Signals_2.1 | length 8.6
  Top Layer w0.254: Signals_2.1@1781.801,1107.186 1781.801,1108.564 D7.DTB.2@1786.906,1113.67
OK-PHT3: D7.DTC.2 Signals_3.1 | length 8.4
  Top Layer w0.254: Signals_3.1@1781.928,1135.78 1781.928,1138.174 1784.348,1140.594 D7.DTC.2@1786.906,1140.594
OK-PHT4: D7.DTD.2 Signals_4.1 | length 9.1
  Top Layer w0.254: Signals_4.1@1782.055,1161.034 1782.055,1163.701 1785.872,1167.518 D7.DTD.2@1786.906,1167.518
PHB1: D5.DTA.1 pad.8@1791.076,1069.718 pad.9@1813.174,1081.91 pad.17 R8.DTA.1 R20.2 U3.DTA.12 U4.DTA.2 U14.3 | length 109
  Top Layer w0.254: pad.8@1791.076,1069.718 1791.965,1069.718 1792.859,1070.613 U3.DTA.12@1792.859,1072.141 ; U4.DTA.2@1809.719,1080.258 1809.719,1081.91 ; R8.DTA.1@1811.646,1083.705 1811.589,1083.761 D5.DTA.1@1809.233,1083.761 1809.233,1083.462 1809.719,1082.977 1809.719,1081.91 ; pad.9@1813.174,1081.91 1809.719,1081.91 ; R20.2@1825.863,1130.817 1825.362,1131.319 pad.17@1825.362,1133.221 1826.251,1133.221 1828.029,1134.999 U14.3@1828.029,1135.824
  Bottom Layer w0.254: pad.8@1791.076,1069.718 1791.076,1078.354 1794.632,1081.91 pad.9@1813.174,1081.91 1819.393,1088.13 1819.393,1124.712 1825.362,1130.681 pad.17@1825.362,1133.221 pad.17@1825.163,1133.031
PHB2: D5.DTB.1 pad.8@1791.076,1096.642 pad.9@1813.174,1108.834 pad.14 R8.DTB.1 R21.2 U3.DTB.12 U4.DTB.2 U14.8 | length 99.4
  Top Layer w0.254: pad.8@1791.076,1096.642 1791.312,1096.642 1792.859,1098.189 U3.DTB.12@1792.859,1099.065 ; U4.DTB.2@1809.719,1107.182 1809.719,1108.834 ; R8.DTB.1@1811.646,1110.629 1811.589,1110.685 1809.233,1110.685 D5.DTB.1@1809.233,1110.638 1809.233,1110.386 1809.719,1109.901 1809.719,1108.834 ; pad.9@1813.174,1108.834 1809.719,1108.834 ; U14.8@1833.109,1140.524 1833.109,1141.984 pad.14@1832.474,1142.619 1833.282,1143.427 R21.2@1833.282,1144.769
  Bottom Layer w0.254: pad.8@1791.076,1096.642 1791.076,1105.278 1794.632,1108.834 pad.9@1813.174,1108.834 1818.123,1113.784 1818.123,1125.22 1818.631,1125.728 1818.631,1139.19 1823.965,1144.524 1830.569,1144.524 pad.14@1832.474,1142.619
PHB3: D5.DTC.1 pad.8@1791.076,1123.566 pad.9@1813.174,1135.758 pad.21 R8.DTC.1 R23.2 U3.DTC.12 U4.DTC.2 U15.3 | length 73.2
  Top Layer w0.254: pad.8@1791.076,1123.566 1791.965,1123.566 1792.859,1124.461 U3.DTC.12@1792.859,1125.989 ; U4.DTC.2@1809.719,1134.106 1809.719,1135.758 ; R8.DTC.1@1811.646,1137.553 1811.589,1137.609 D5.DTC.1@1809.233,1137.609 1809.233,1137.31 1809.719,1136.825 1809.719,1135.758 ; pad.9@1813.174,1135.758 1809.719,1135.758 ; R23.2@1825.863,1149.759 1825.616,1150.006 pad.21@1825.616,1151.763 1827.153,1151.763 1828.029,1152.639 U15.3@1828.029,1154.366
  Bottom Layer w0.254: pad.8@1791.076,1123.566 1791.076,1132.202 1794.632,1135.758 pad.9@1813.174,1135.758 ; pad.9@1813.107,1135.825 1825.616,1148.334 pad.21@1825.616,1151.763
PHB4: D5.DTD.1 pad.8@1791.076,1150.49 pad.9@1813.174,1162.682 pad.19 R8.DTD.1 R25.2 U3.DTD.12 U4.DTD.2 U15.8 | length 70.2
  Top Layer w0.254: pad.8@1791.076,1150.49 1791.965,1150.49 1792.859,1151.385 U3.DTD.12@1792.859,1152.913 ; U4.DTD.2@1809.719,1161.03 1809.719,1162.682 ; R8.DTD.1@1811.646,1164.477 1811.589,1164.533 D5.DTD.1@1809.233,1164.533 1809.233,1164.234 1809.719,1163.749 1809.719,1162.682 ; pad.9@1813.174,1162.682 1809.719,1162.682 ; U15.8@1833.109,1159.066 1833.109,1160.272 pad.19@1832.22,1161.161 1833.282,1162.223 R25.2@1833.282,1163.292
  Bottom Layer w0.254: pad.8@1791.076,1150.49 1791.076,1159.126 1794.632,1162.682 pad.9@1813.174,1162.682 ; pad.9@1813.174,1162.685 1830.696,1162.685 pad.19@1832.22,1161.161
PHT1: D8.DTA.1 pad.6@1806.956,1072.649 pad.7@1813.174,1071.242 pad.10@1797.168,1077.849 pad.15 R15.DTA.1 R19.2 U3.DTA.1 U4.DTA.11 U14.6 | length 107.6
  Top Layer w0.254: U3.DTA.1@1795.399,1077.591 1795.658,1077.849 pad.10@1797.168,1077.849 ; pad.6@1806.829,1072.776 1807.179,1073.125 U4.DTA.11@1807.179,1074.808 ; D8.DTA.1@1809.106,1070.045 1811.589,1070.045 R15.DTA.1@1811.646,1070.102 1811.646,1070.353 pad.7@1813.174,1071.242 ; U14.6@1831.839,1135.824 1831.839,1134.237 pad.15@1831.1,1133.19 1833.282,1131.524 R19.2@1833.282,1130.78
  Bottom Layer w0.254: pad.10@1797.168,1077.849 1806.186,1077.849 1806.956,1077.079 pad.6@1806.956,1072.649 1806.956,1072.268 1808.48,1070.744 1812.036,1070.744 pad.7@1813.174,1071.242 1815.202,1073.271 1815.202,1082.802 1820.028,1087.628 1820.028,1124.585 1827.902,1132.459 1830.061,1132.459 pad.15@1831.1,1133.19
PHT2: D8.DTB.1 pad.6@1806.956,1099.573 pad.7@1813.174,1098.166 pad.10@1797.168,1104.773 pad.13 R15.DTB.1 R22.2 U3.DTB.1 U4.DTB.11 U14.11 | length 94.6
  Top Layer w0.254: U3.DTB.1@1795.399,1104.515 1795.658,1104.773 pad.10@1797.168,1104.773 ; pad.6@1806.829,1099.7 1807.179,1100.049 U4.DTB.11@1807.179,1101.732 ; D8.DTB.1@1809.106,1096.969 1811.589,1096.969 R15.DTB.1@1811.646,1097.026 1811.646,1097.277 pad.7@1813.174,1098.166 ; R22.2@1825.863,1144.806 1825.863,1144.15 1827.394,1142.619 pad.13@1828.029,1142.619 1829.299,1141.349 U14.11@1829.299,1140.524
  Bottom Layer w0.254: pad.10@1797.168,1104.773 1799.2,1104.773 1800.216,1105.789 1805.17,1105.789 1806.956,1104.003 pad.6@1806.956,1099.573 1806.956,1099.192 1808.48,1097.668 1812.036,1097.668 pad.7@1813.174,1098.166 1817.993,1098.166 1818.758,1098.931 1818.758,1124.966 1819.266,1125.474 1819.266,1138.809 1824.092,1143.635 1827.013,1143.635 pad.13@1828.029,1142.619
PHT3: D8.DTC.1 pad.6@1806.956,1126.497 pad.7@1813.174,1125.09 pad.10@1797.295,1131.697 pad.20 R15.DTC.1 R24.2 U3.DTC.1 U4.DTC.11 U15.6 | length 75.1
  Top Layer w0.254: U3.DTC.1@1795.399,1131.439 1795.658,1131.697 pad.10@1797.295,1131.697 ; pad.6@1806.829,1126.624 1806.829,1128.306 U4.DTC.11@1807.179,1128.656 ; D8.DTC.1@1809.106,1123.893 1811.589,1123.893 R15.DTC.1@1811.646,1123.95 1811.646,1124.201 pad.7@1813.174,1125.09 ; U15.6@1831.839,1154.366 1831.839,1153.03 1830.874,1151.808 pad.20@1830.9,1151.59 1831.362,1151.392 1832.239,1151.744 1833.282,1150.701 R24.2@1833.282,1149.722
  Bottom Layer w0.254: pad.10@1797.295,1131.697 1798.315,1131.697 1799.331,1132.713 1805.17,1132.713 1806.956,1130.927 pad.6@1806.956,1126.497 1806.956,1126.116 1808.48,1124.592 1812.036,1124.592 pad.7@1813.174,1125.09 1817.26,1125.09 1818.147,1125.977 1818.147,1139.722 1828.918,1150.493 1829.553,1150.493 pad.20@1830.9,1151.59
PHT4: D8.DTD.1 pad.6@1806.956,1153.421 pad.7@1813.174,1152.014 pad.10@1797.168,1158.621 pad.18 R15.DTD.1 R26.2 U3.DTD.1 U4.DTD.11 U15.11 | length 60.3
  Top Layer w0.254: U3.DTD.1@1795.399,1158.363 1795.658,1158.621 pad.10@1797.168,1158.621 ; pad.6@1806.829,1153.548 1807.179,1153.897 U4.DTD.11@1807.179,1155.58 ; D8.DTD.1@1809.106,1150.817 1811.589,1150.817 R15.DTD.1@1811.646,1150.874 1811.646,1151.125 pad.7@1813.174,1152.014 ; R26.2@1825.863,1163.329 1825.863,1162.311 1826.886,1161.288 pad.18@1827.902,1161.288 1829.299,1159.891 U15.11@1829.299,1159.066
  Bottom Layer w0.254: pad.10@1797.168,1158.621 1798.057,1158.621 1799.581,1160.145 1804.662,1160.145 1806.956,1157.851 pad.6@1806.956,1153.421 1806.956,1153.04 1808.48,1151.516 1812.036,1151.516 pad.7@1813.174,1152.014 1813.972,1152.014 1816.57,1154.613 1816.57,1159.989 1818.504,1161.923 1827.267,1161.923 pad.18@1827.902,1161.288
pads on no net: INV_CONTROL.a1 INV_CONTROL.a2 INV_CONTROL.k1 INV_CONTROL.k2 PWM_AB.a1 PWM_AB.a2 PWM_AB.k1 PWM_AB.k2 PWM_CN.a1 PWM_CN.a2 PWM_CN.k1 PWM_CN.k2 U1.3 U4.DTA.4 U4.DTA.10 U4.DTB.4 U4.DTB.10 U4.DTC.4 U4.DTC.10 U4.DTD.4 U4.DTD.10

## Polygon pours and split planes (outlines as drawn)
no net on Top Overlay "Top Layer-No Net" (solid, remove dead copper): 1845.06,1034.367 1845.06,1034.748 1845.314,1034.748 1845.314,1034.367
0 on Top Layer "Plano terra" (solid, remove dead copper, pour order 34): 1767.12,1163.67 1777.22,1163.67 1783.18,1170.4 1816.17,1169.9 1854.47,1169.9 1854.47,1111.6 1859.42,1111.6 1859.42,1097.1 1862.67,1097.1 1862.67,1072.76 1858.75,1072.76 1858.75,1054.715 1856.54,1054.715 1856.54,1049.55 1816.17,1049.55 1815.235,1050.485 1815.235,1054.715 1767.12,1054.715
EARTH on Top Layer "Earth" (solid, pour order 38): 1766.969,1174.596 1767.07,1174.495 1767.07,1167.5 1767.07,1167.4 1769.87,1164.6 1769.97,1164.7 1773.97,1164.7 1774.07,1164.7 1777.37,1168 1783.97,1174.6
0 on Top Layer "Top Layer-No Net" (solid, pour order 8): 1849.238,1031.752 1849.238,1027.303 1849.746,1026.795 1859.525,1026.795 1861.43,1028.7 1861.43,1042.162 1859.652,1043.94 1832.601,1043.94 1830.569,1045.972 1829.426,1045.972 1829.172,1046.226 1829.172,1051.814 1830.442,1053.084 1852.896,1053.084 1857.88,1048.1 1861.47,1048.1 1863.87,1045.7 1863.87,1026.314 1861.938,1024.382 1818.885,1024.382 1816.37,1026.897 1816.37,1051.814 1822.568,1051.814 1821.171,1050.417 1821.171,1028.7 1823.076,1026.795 1843.523,1026.795 1846.317,1029.589 1846.317,1031.875 1846.825,1032.383 1848.607,1032.383
0 on Top Layer "Top Layer-No Net" (solid, pour order 6): 1849.365,1033.272 1849.111,1033.018 1847.714,1033.018 1847.46,1033.272 1847.46,1039.622 1849.365,1039.622
0 on Top Layer "Top Layer-No Net" (solid, pour order 10): 1846.571,1035.91 1844.568,1035.91 1844.031,1036.447 1844.031,1038.987 1843.523,1039.495 1840.602,1039.495 1839.967,1040.13 1839.967,1042.162 1840.602,1042.797 1844.158,1042.797 1845.047,1041.908 1845.047,1036.193 1846.571,1036.193
NetCin3_1 on Top Layer "Top Layer-No Net" (solid, pour order 16): 1850,1034.669 1850,1027.811 1850.508,1027.303 1858.763,1027.303 1860.033,1028.573 1860.033,1041.908 1858.509,1041.908 1857.112,1040.511 1857.112,1033.907 1855.334,1032.129 1853.661,1032.129 1852.667,1033.123 1852.667,1033.399 1851.397,1034.669
NetCbst1_2 on Top Layer "pol-NetCbst1_2" (solid, pour order 4): 1846.571,1035.177 1823.838,1035.177 1821.806,1033.145 1821.806,1029.335 1823.838,1027.303 1841.745,1027.303 1843.396,1028.954 1843.396,1032.891 1845.428,1034.923 1846.571,1034.923
NetD33_1 on Top Layer "Pol-D33_1" (solid, pour order 2): 1846.571,1035.685 1844.158,1035.685 1843.65,1036.193 1843.65,1038.352 1843.015,1038.987 1840.348,1038.987 1839.459,1039.876 1839.459,1042.035 1838.697,1042.797 1833.109,1042.797 1831.839,1041.527 1831.839,1036.701 1832.855,1035.685 1842.761,1035.685 1843.015,1035.431 1846.571,1035.431
+8V on Top Layer "Top Layer-No Net" (solid, pour order 12): 1830.569,1035.939 1822.568,1035.939 1821.806,1036.701 1821.806,1048.258 1823.33,1049.782 1824.346,1049.782 1825.743,1051.179 1828.092,1051.179 1828.092,1046.035 1828.798,1045.337 1830.188,1045.337 1831.331,1044.194 1831.331,1036.701
NetCbst1_1 on Top Layer "pol-NetCbst1_1" (solid, pour order 0): 1845.555,1034.669 1845.555,1034.415 1844.285,1033.145 1844.285,1030.224 1845.682,1030.224 1845.682,1032.891 1846.063,1033.272 1846.825,1034.034 1846.825,1034.542 1846.825,1034.669
EARTH on Top Layer "Earth" (solid, pour order 40): 1767.07,1174.495 1767.07,1167.5 1769.87,1164.7 1769.97,1164.7 1774.07,1164.7 1781.707,1172.337 1845.07,1172.337 1856.2,1172.337 1856.2,1112.46 1861.26,1112.46 1861.26,1098.03 1863.5,1098.03 1863.5,1071.65 1859.88,1071.65 1859.88,1053.66 1857.93,1053.66 1857.93,1050.1 1858.95,1049.08 1861.26,1049.08 1864.77,1045.57 1864.77,1025.41 1861.96,1022.6 1768.97,1022.6 1767.07,1020.7 1766.97,1020.6 1766.97,1016.9 1865.94,1016.9 1866.029,1016.989 1866.07,1017.03 1866.07,1174.5 1767.065,1174.5 1766.969,1174.596
EARTH on Bottom Layer "earth" (solid, pour order 30): 1769.736,1174.496 1769.101,1174.496 1767.069,1174.496 1767.069,1173.353 1767.069,1172.464 1767.069,1167.511 1767.069,1167.384 1769.609,1164.844 1769.863,1164.59 1773.292,1164.59 1774.054,1164.59 1776.594,1167.13 1777.356,1167.892 1777.356,1170.178 1777.356,1170.305 1778.372,1171.321 1779.515,1172.464 1851.143,1172.464 1853.429,1170.178 1853.429,1113.79 1853.429,1113.663 1855.715,1111.377 1855.969,1111.123 1860.414,1111.123 1863.335,1108.202 1863.335,1095.375 1863.335,1062.101 1863.335,1061.593 1857.874,1056.132 1856.985,1055.243 1856.985,1053.211 1856.985,1050.29 1857.62,1049.655 1858.255,1049.02 1860.668,1049.02 1861.303,1049.02 1862.446,1047.877 1864.605,1045.718 1864.605,1037.082 1864.605,1025.271 1862.446,1023.112 1861.811,1022.477 1844.285,1022.477 1769.482,1022.477 1768.339,1021.334 1768.085,1021.08 1768.085,1018.794 1768.085,1018.286 1768.085,1016.889 1769.99,1016.889 1861.43,1016.889 1862.827,1016.889 1866.129,1016.889 1866.129,1018.794 1866.129,1020.191 1866.129,1027.557 1866.129,1170.559 1866.129,1174.496 1862.192,1174.496
0 on Bottom Layer "Plano terra" (solid, pour order 32): 1767.382,1174 1865.67,1174 1865.67,1016 1864.67,1017 1814.67,1017 1814.67,1054.2 1809.62,1054.2 1807.93,1055.89 1802.76,1055.89 1801.42,1054.2 1788.325,1054.2 1786.12,1056.405 1781.305,1056.405 1779.1,1054.2 1767.02,1054.2

## Keep-outs
Keep-Out Layer:
  lines w0.1: 1807.724,1050.62 1807.724,1053.62 1806.974,1054.37 1803.872,1054.37 1803.394,1053.892 1803.394,1050.52 1801.904,1050.52 1801.904,1054.56 1803.034,1055.69 1807.754,1055.69 1809.144,1054.3 1809.144,1050.59 1807.754,1050.59 ; 1865.87,1016.61 1767.02,1016.61 1767.01,1016.62 1767.01,1174.6 1865.84,1174.6 1865.87,1174.57 1865.87,1016.61 ; 1865.87,1016.61 1865.87,1016.61 ; 1780.06,1050.52 1781.55,1050.52 1781.55,1053.892 1782.028,1054.37 1785.13,1054.37 1785.88,1053.62 1785.88,1050.62 1785.91,1050.59 1787.3,1050.59 1787.3,1054.3 1785.91,1055.69 1781.19,1055.69 1780.06,1054.56 1780.06,1050.52

## Other copper
Top Layer:
  text "Logic inverter - Hildo G Jr - May 2017" at 1799.47,1017.9 h3

## Silkscreen, mask and mechanical layers (free items; w line width, h text height)
Top Overlay:
  lines w0.1: 1799.27,1151.8 1799.27,1148.9 1799.77,1148.4 ; 1799.37,1098.1 1799.37,1095.2 1799.87,1094.7 ; 1799.37,1124.7 1799.37,1121.8 1799.87,1121.3 ; 1799.47,1148.4 1799.77,1148.4 ; 1799.57,1094.7 1799.87,1094.7 ; 1799.57,1116.2 1799.57,1113.3 1800.07,1112.8 ; 1799.57,1121.3 1799.87,1121.3 ; 1799.77,1112.8 1800.07,1112.8 ; 1799.77,1148.8 1799.77,1148.4 ; 1799.87,1095.1 1799.87,1094.7 ; 1799.87,1121.7 1799.87,1121.3 ; 1800.07,1113.2 1800.07,1112.8 ; 1809.97,1087.5 1809.97,1087 ; 1810.37,1141 1810.07,1141 ; 1810.47,1087 1809.97,1087 ; 1813.77,1087.9 1810.37,1087.9 1810.27,1087.8 1810.27,1087.3 1809.97,1087 ; 1813.77,1141.6 1810.67,1141.6 1810.57,1141.5 1810.07,1141 ; 1810.07,1141 1810.07,1141.4 1810.07,1141

## Text inside footprints (layer, text, board x,y; h text height)
P3: Top Overlay "1" at 1803.021,1026.305 h1.02
P4: Top Overlay "1" at 1781.177,1026.305 h1.02
P3000: Top Overlay "2" at 1827.013,1074.547 h1.27 r90; Top Overlay "1" at 1829.553,1075.055 h1.27 r90; Top Overlay "9" at 1829.553,1088.771 h1.27 r90; Top Overlay "10" at 1827.013,1088.771 h1.27 r90